# EAGLE board cat layout fnl4 (EAGLE 6.5.0)
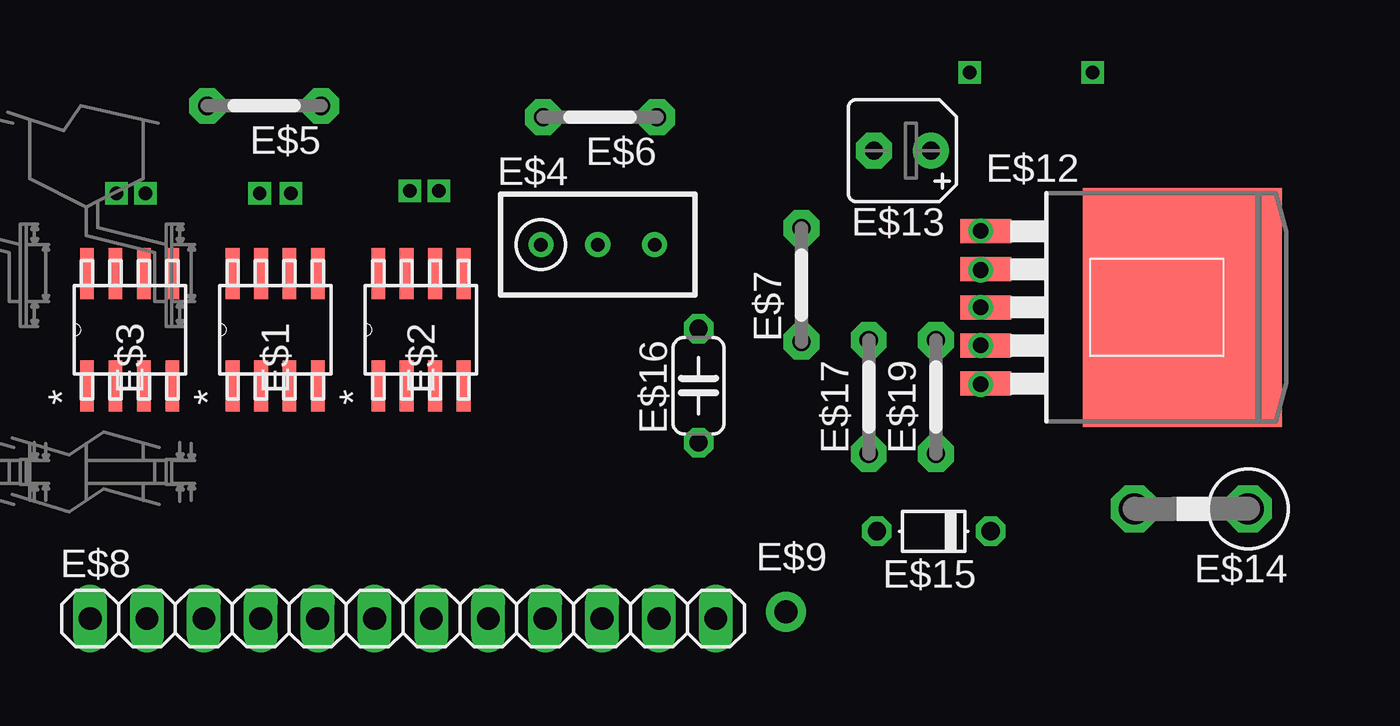
[diagram p0: board, top side]
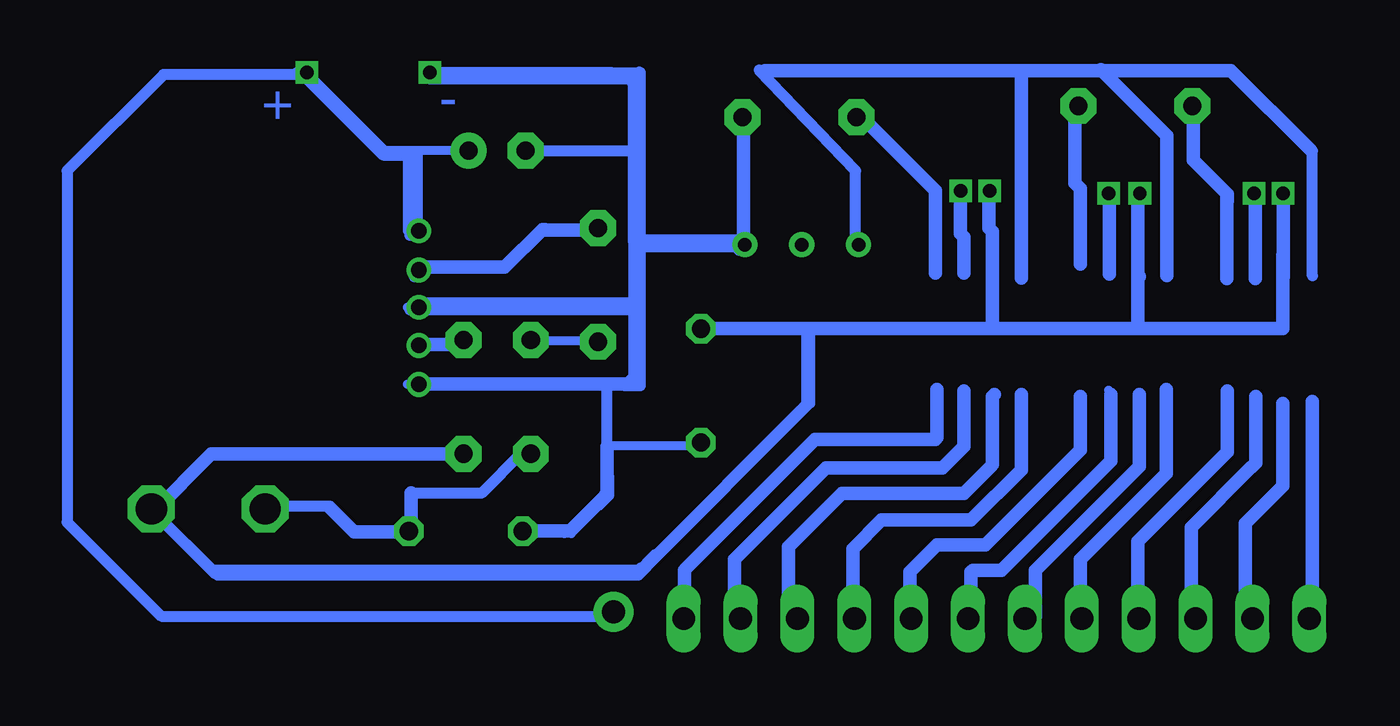
[diagram p1: board, bottom side, seen from below]

No outline drawn. Coordinates in mm, seen from the top.
Copper layers (1*16): Top 0.035mm / dielectric 1.5mm / Bottom 0.035mm
Design rules "default": minimum track width 10mil, minimum drill 24mil, track to track 8mil, track to pad 8mil, pad to pad 8mil, via to via 8mil, smd to smd 8mil, copper to edge 40mil, drill to drill 8mil, minimum pad ring 10mil, minimum via ring 8mil, stop-mask expansion 4mil, vias tented up to drill 0mil, thermal gap 10mil

## Footprints (pad centres in the part's own frame; a part is rotated, then mirrored left to right if it is on the bottom)
M08A-M = smd 2.286 x 0.61: 1 -2.515,1.905; 2 -2.515,0.635; 3 -2.515,-0.635; 4 -2.515,-1.905; 5 2.515,-1.905; 6 2.515,-0.635; 7 2.515,0.635; 8 2.515,1.905
RTRIM3296W = drill 0.61: 1 0,-2.54; 2 0,0; 3 0,2.54
05 = drill 0.813 pad 1.6 octagon: 1 -2.54,0; 2 2.54,0
1X12 = drill 1.016 long: 1 -13.97,0; 2 -11.43,0; 3 -8.89,0; 4 -6.35,0; 5 -3.81,0; 6 -1.27,0; 7 1.27,0; 8 3.81,0; 9 6.35,0; 10 8.89,0; 11 11.43,0; 12 13.97,0
1X01-CLEANBIG = drill 1.016 pad 1.778: 1 0,0
DDPAK5(Q) = smd 1.067 x 2.286: 1 -3.404,-8.763; 2 -1.702,-8.763; 3 0,-8.763; 4 1.702,-8.763; 5 3.404,-8.763 | smd 10.668 x 8.89: TAB 0,0
B45181A = drill 0.813 pad 1.6: + -1.27,0 | drill 0.813 pad 1.6 octagon: - 1.27,0
C1702-05 = drill 1.397 octagon: A 2.54,0; C -2.54,0
D-5 = drill 0.813 octagon: A 2.54,0; C -2.54,0
C050-024X044 = drill 0.813 octagon: 1 -2.54,0; 2 2.54,0

## Placement (x,y rotation side)
E$1  [M08A-M]  39,68.5 90 top
E$2  [M08A-M]  45.5,68.5 90 top
E$3  [M08A-M]  32.5,68.5 90 top
E$4  [RTRIM3296W]  53.4,72.3 270 top
E$5  [05]  38.5,78.5 180 top
E$6  [05]  53.5,78 180 top
E$7  [05]  62.5,70.5 90 top
E$8  [1X12]  44.7,55.6 0 top
E$9  [1X01-CLEANBIG]  61.8,55.9 0 top
E$12  [DDPAK5(Q)]  79.5,69.5 270 top
E$13  [B45181A]  67,76.5 180 top
E$14  [C1702-05]  79.9,60.5 180 top
E$15  [D-5]  68.4,59.5 180 top
E$16  [C050-024X044]  57.9,66 90 top
E$17  [05]  65.5,65.5 90 top
E$19  [05]  68.5,65.5 90 top

## Library data of the parts
E$1-E$3 = catlm
E$4 E$13-E$15 = ref-packages-longpad
E$5-E$7 E$17 E$19 = Misc
E$8 E$9 = adafruit
E$12 = PowerProducts
E$16 = PAsystem

## Tracks (layer width: path | path; a pad name or v marks a point on that pad's centre or on a via)
S$1
  Bottom 0.5: 51,72.3 51,75.6 55.3,80.1
S$2
  Bottom 0.406: 79.4,57.5 82.4,60.5 81.9,60.5
S$3
  Bottom 0.61: 30.6,65.3 30.6,55.6
S$4
  Bottom 0.61: 58.48,55.92 58.96,55.44
S$5
  Bottom 0.406: 53,68.5 53,65.2 60.4,57.8 79.7,57.8
S$6
  Bottom 0.61: 47.36,65.84 47.36,63.68 47.44,63.6 52.8,63.6 58.56,57.84
S$7
  Bottom 0.61: 58.64,57.76 58.64,55.6 59.04,55.2
S$8
  Bottom 0.5: 75.6,79.9 81.9,79.9 86.2,75.6 86.2,59.9 82,55.7 61.8,55.7 61.4,56.1
S$9
  Bottom 0.406: 34.3,65.5 34.5,65.7
S$10
  Bottom 0.61: 56.4,55.52 56.08,55.2
S$11
  Bottom 0.61: 48.56,55.6 48.4,55.44
S$12
  Bottom 0.61: 44.8,65.6 44.88,65.52 44.88,62.48
S$13
  Bottom 0.61: 39.6,65.6 39.6,62.64 44.48,57.76 45.76,57.76
S$14
  Bottom 0.61: 43.6,65.6 43.6,62.24 45.84,60 49.84,60 51.12,58.72 51.12,55.52 51.2,55.44
S$15
  Bottom 0.61: 46.16,65.76 46.16,63.28 47.12,62.32 52.32,62.32 56.4,58.24 56.4,55.28 56.32,55.2
S$16
  Bottom 0.61: 44.96,62.4 46.16,61.2 51.6,61.2 54,58.8 54,55.6 53.92,55.52
S$17
  Bottom 0.61: 38.32,65.6 38.32,62.4 42.96,57.76 42.96,55.68 43.28,55.36
S$18
  Bottom 0.61: 47.44,71.04 47.44,74.72 50.8,78.08 50.96,78.08
S$19  (via drill 0.7)
  Bottom 0.406: 71,69.5 v70.5,69.5
S$20
  Bottom 0.61: 38.32,70.88 38.4,70.96 38.4,74.56
S$21
  Bottom 0.5: 74.5,60.6 77.4,60.6 77.5,60.5
S$22
  Bottom 0.5: 70.9,69.4 60.6,69.4 60.6,69.5
S$23
  Bottom 0.61: 46.16,71.04 46.16,72.64 46.32,72.8 46.32,73.12 46.32,73.28 46.32,74.72
S$24
  Bottom 0.406: 62.5,68 65.5,68
S$25  (via drill 0.7)
  other vias: 70.5,67.8
S$26  (via drill 0.7)
  other vias: 70.5,71.17
S$27
  Bottom 0.61: 39.66,70.99 39.66,74.51
S$28
  Bottom 0.61: 37.1,70.93 37.1,77.17 40.05,80.12
S$29
  Bottom 0.61: 34.41,70.79 34.41,74.44 34.39,74.46
S$30
  Bottom 0.61: 41.2,78.32 41.2,75.04 40.96,74.8 40.96,71.44
S$31
  Bottom 0.5: 54.9,80 55,80.1
S$32
  Bottom 0.61: 33.14,70.79 33.14,74.57 33.25,74.68
S$33
  Bottom 0.61: 31.89,70.85 31.89,74.74
S$34
  Bottom 0.61: 56,78.06 56,72.27 56.17,72.1
S$35
  Bottom 0.406: 58,68.8 58,68.6 | 58,68.6 58,68.5 | 57.9,68.7 58,68.6
S$36
  Bottom 0.61: 62.58,72.96 64.88,72.96
S$37
  Bottom 0.61: 37.12,65.84 37.12,62.08 40.96,58.24 40.96,55.36 40.88,55.28
S$38
  Bottom 0.61: 64.86,72.98 64.97,72.98 66.66,71.29 70.52,71.29 70.6,71.21
S$39
  Bottom 0.61: 34.4,74.24 34.4,74.48
S$40
  Bottom 0.5: 41.1,78.3 41,78.4
S$41
  Bottom 0.406: 34.5,65.1 34.4,65
S$42  (via drill 0.6, 0.7)
  Bottom 0.406: 76,80 v75.5,80 72,76.5 71,76.5 | 71,72.92 71,76.5 | 68,76.5 70.5,76.5 | 70.5,76.5 71,76.5 | v70.5,72.92 70.5,76.5
S$43
  Bottom 0.5: 60.7,72.6 60.7,72.2 56,72.2 56,72.5 60.8,72.5 60.9,72.4 | 60.9,72.4 60.9,72.6 | 60.9,72.6 60.9,79.5 61.1,79.7 70,79.7 70.1,79.8 60.8,79.8 60.8,72.7 60.9,72.6 | 60.9,72.4 60.9,66.4 61.3,66
S$44
  Bottom 0.61: 70.52,67.85 68.58,67.85
S$45
  Bottom 0.406: 57.9,63.2 57.9,63.3 | 57.9,63.3 57.9,63.5 | 57.9,63.3 62,63.3 | 62,63.3 62.1,63.3 | 62,63.3 62,61.1 62.3,61.1 63.8,59.6 | 62.2,63.3 62.2,60.9 63.7,59.4 64,59.4 | 64,59.4 66,59.4 | 64,59.4 63.8,59.6 | 63.8,59.6 65.9,59.6 66.1,59.4
  Bottom 0.5: 62.1,63.3 62.1,65.9 | 66.1,59.4 66.2,59.5
S$46
  Bottom 0.5: 75.6,80.1 75.8,80.1 75.8,80 72.1,76.3 70.7,76.3 70.7,72.92 70.9,72.72
S$47
  Bottom 0.5: 65.5,63 65.9,63 67.7,61.2 70.9,61.2
S$48
  Bottom 0.61: 68.52,62.96 79.76,62.96 82.37,60.35
S$49
  Bottom 0.5: 70.5,71.07 70.7,70.87 70.7,70.9
S$50
  Bottom 0.5: 70.4,65.76 70.8,66.16
S$51
  Bottom 0.5: 79.6,57.6 82.4,60.4
S$52  (via drill 0.6)
  other vias: 31.9,74.6
S$53  (via drill 0.6)
  other vias: 33.2,74.6
S$54  (via drill 0.6)
  other vias: 38.3,74.6
S$55  (via drill 0.6)
  other vias: 39.7,74.6
S$56  (via drill 0.6)
  other vias: 45,74.7
S$57  (via drill 0.6)
  other vias: 46.3,74.7
S$58  (via drill 0.7)
  Bottom 0.406: v70.5,66.06 71,66.06
S$59
  Bottom 0.5: 61.1,69.7 70.2,69.7 70.4,69.5
S$60  (via drill 0.6)
  Bottom 0.406: 60.7,80 62,80
  Bottom 0.5: v70,80 62,80 61.9,80 | 60.7,79.9 60.7,80 60.6,80 60.6,76.5 | 65.8,76.5 60.6,76.5 | 60.6,76.5 60.6,66 61.2,66 60.9,66.3 60.9,66
S$61
  Bottom 0.61: 34.4,65.76 34.4,63.04 38.4,59.04 38.4,55.36 38.32,55.28
S$62
  Bottom 0.61: 33.36,62.32 36,59.68 36,55.68 35.92,55.6
S$63
  Bottom 0.61: 31.92,65.2 31.92,61.52 33.6,59.84 33.6,55.52 33.52,55.44
S$64
  Bottom 0.406: 39.7,65.8 39.6,65.7
S$65
  Bottom 0.61: 59.92,58.4 60.72,57.6 60.8,57.6
S$66
  Bottom 0.406: 53.1,68.4 53.2,68.3 53.2,65.2 60.4,58
S$67
  Bottom 0.61: 45.84,57.68 45.84,55.76 46,55.6
S$68
  Bottom 0.61: 40.96,65.52 40.96,63.12 45.2,58.88 47.36,58.88 48.56,57.68 48.56,55.36
S$69
  Bottom 0.61: 33.12,65.52 33.12,62.56 33.28,62.4
S$70
  Bottom 0.61: 62.08,61.92 62.08,61.12
S$71
  Bottom 0.61: 62.48,60.72 62.16,61.04 62.16,61.12
S$72
  Bottom 0.61: 34.4,74.56 35.92,76.08 35.92,78.48
S$73
  Bottom 0.61: 31.92,71.84 31.92,68.56 58.08,68.56
S$74
  Bottom 0.61: 38.4,70.96 38.4,68.8
S$75
  Bottom 0.61: 44.88,68.72 44.88,72.88 45.04,73.04 45.04,74.72
S$76
  Bottom 0.5: 30.6,70.9 30.6,76.5
S$77
  Bottom 0.61: 43.6,70.8 43.6,79.92
S$78
  Bottom 0.61: 30.72,76.56 34.24,80.08 55.04,80.08
S$79
  Bottom 0.61: 60.81,66.07 70.66,66.07 70.71,66.02
S$80
  Bottom 0.406: 79.6,57.6 79.5,57.5 60.8,57.5 60.4,57.9 60.6,57.9
S$81
  Bottom 0.5: 70.9,59.6 71,59.5
S$82
  Bottom 0.5: 70.9,59.5 73.4,59.5
S$83
  Bottom 0.61: 70.85,61.21 70.85,59.52 70.91,59.46 73.38,59.46 74.49,60.57

## Text on the board
Bottom: - | +